# Altium PCB A1_v31.PcbDoc (part 1 of 2)
Units mm, origin at the board's own origin, x right, y up, seen from the top; angles counter-clockwise.
Board outline 100 x 80 mm, 2 copper layers (Top Layer, Bottom Layer); 46 components, 70 nets, 239 pads, 35 vias.
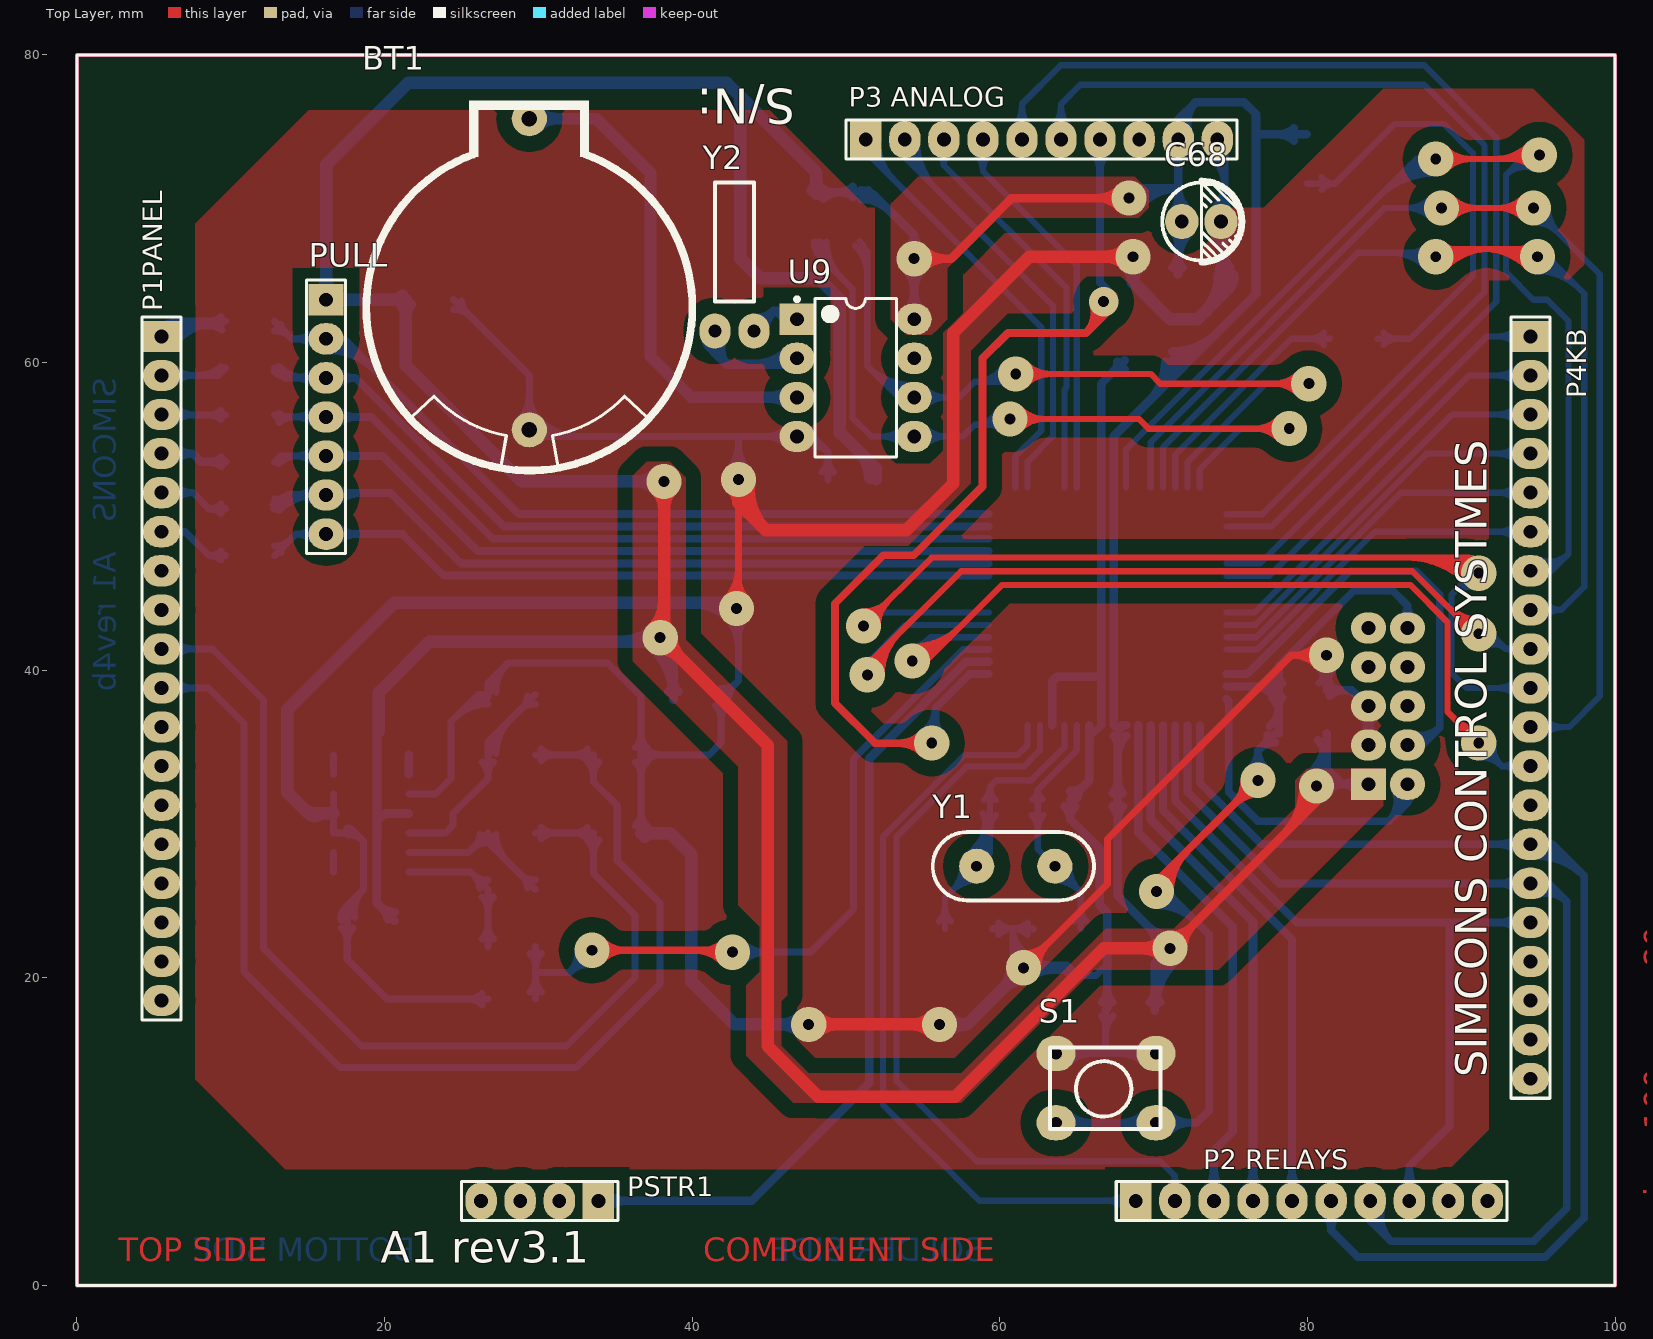
[diagram p0: Top Layer view]
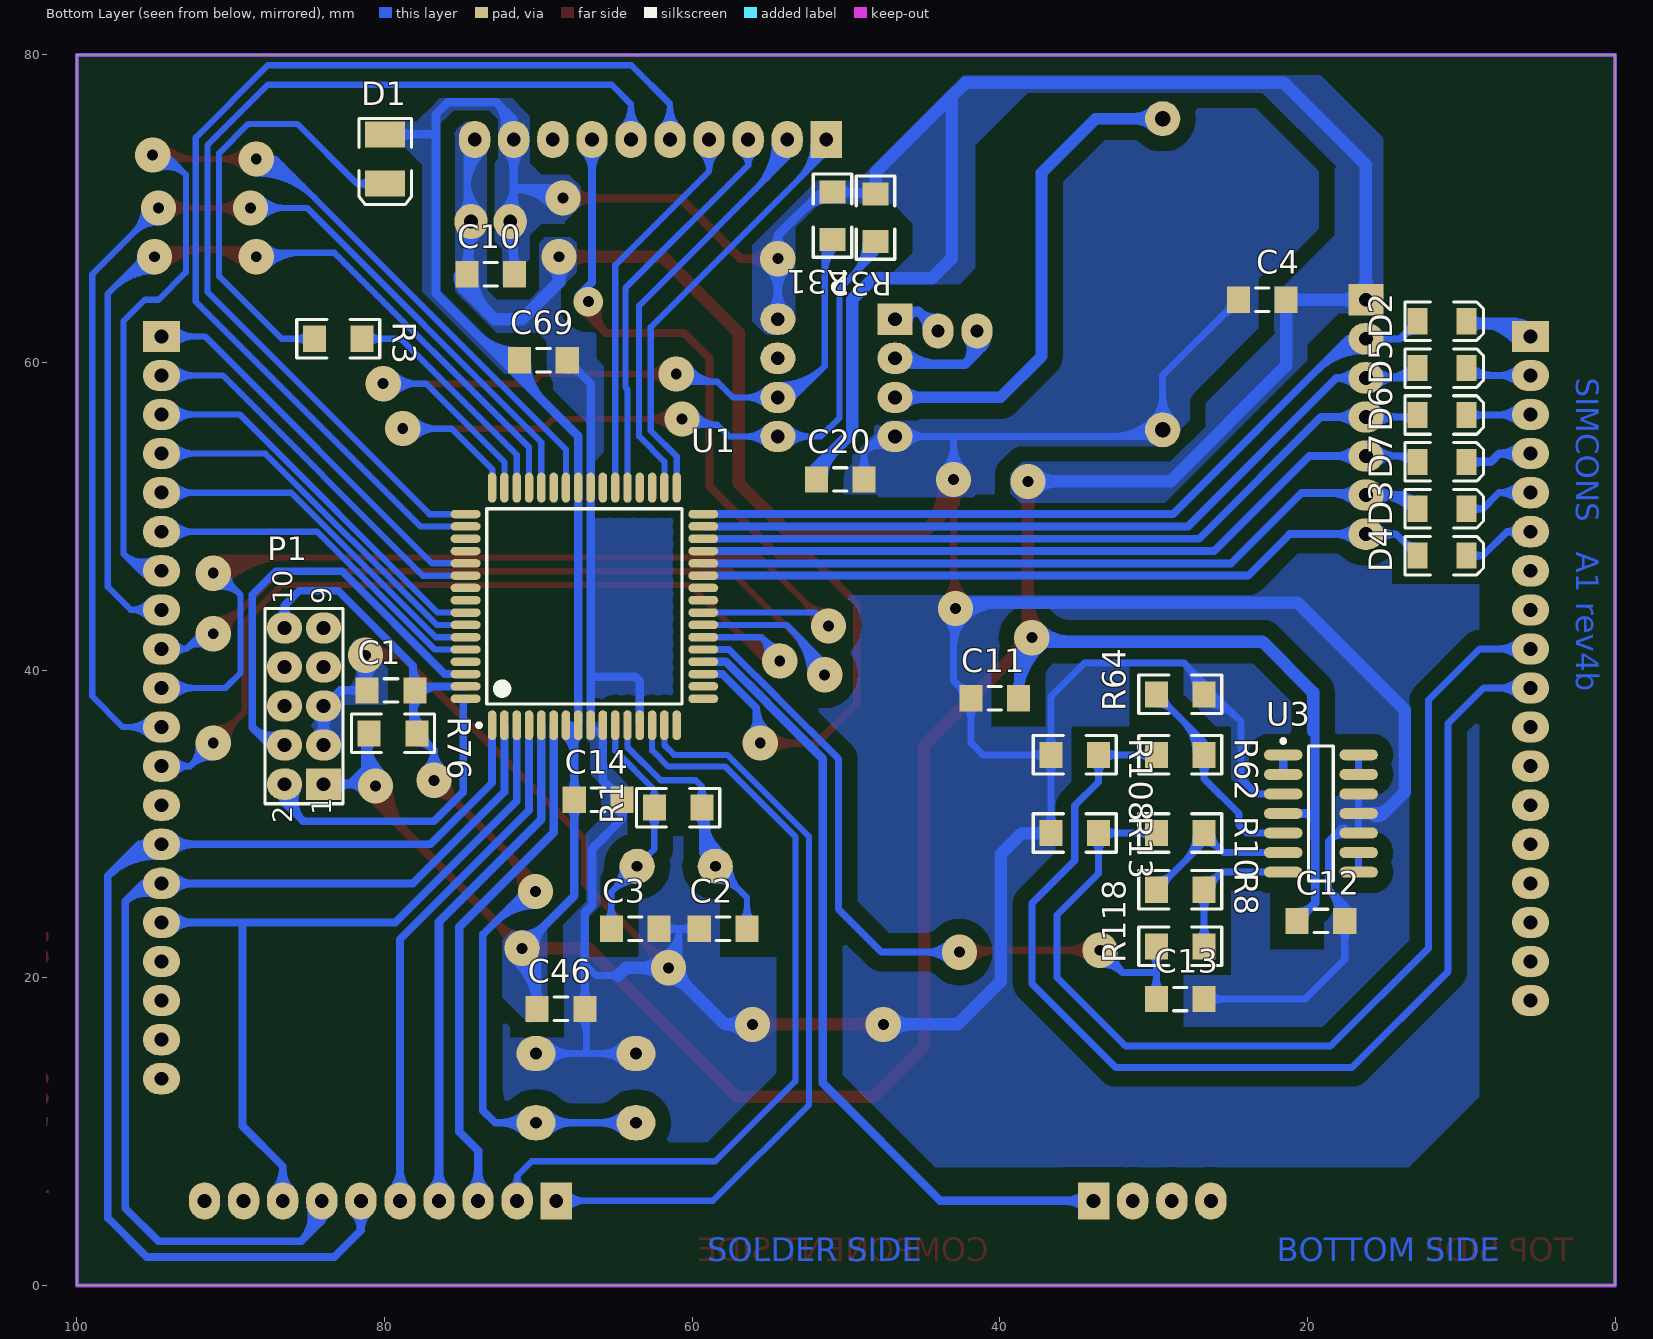
[diagram p1: Bottom Layer view, seen from below]
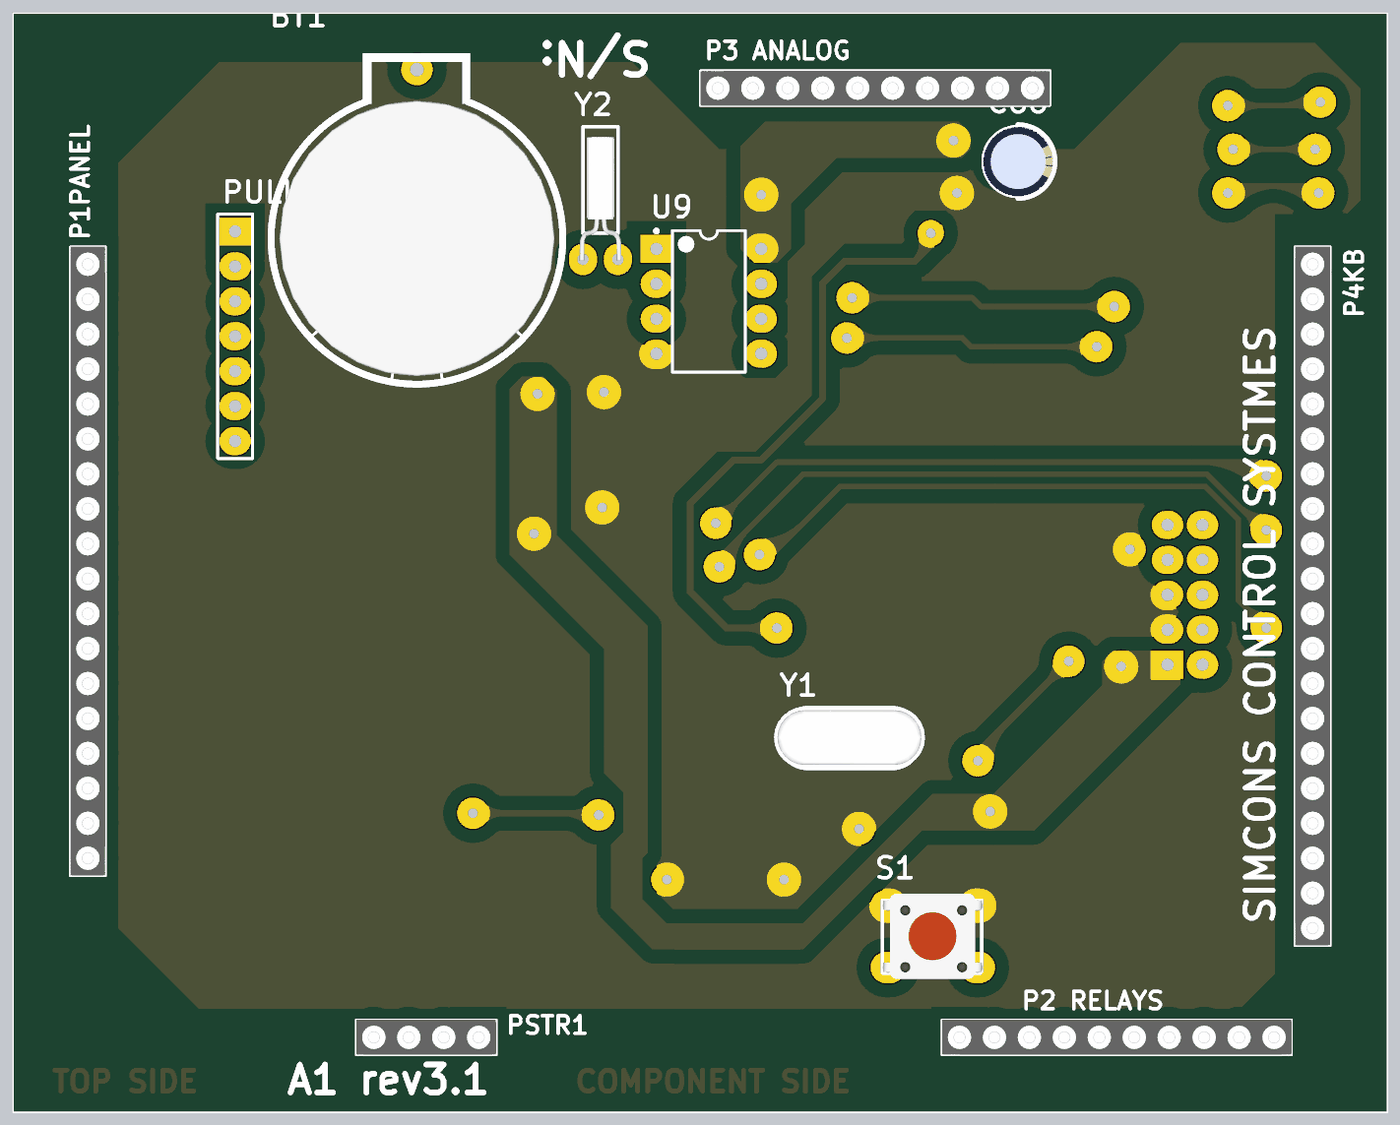
[diagram p3: 3D render of the assembled board from above, using the file's embedded part models]
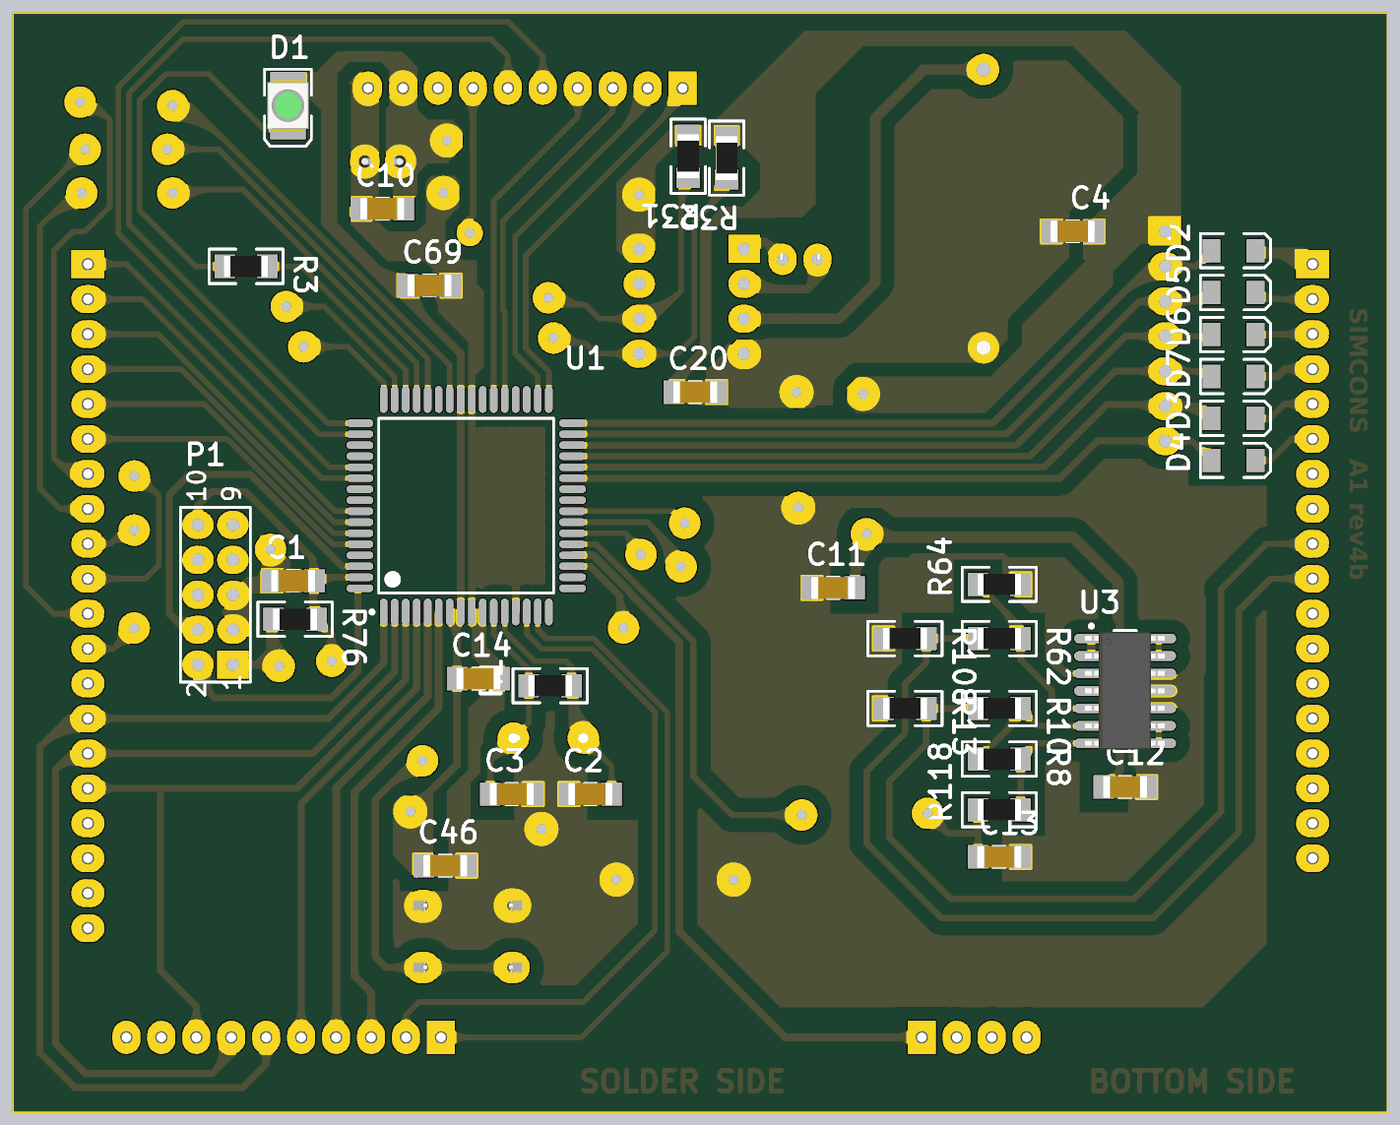
[diagram p4: 3D render of the assembled board from below, using the file's embedded part models]

## Layer stack, top to bottom
Top Solder: solder mask 0.0102, Solder Resist, Dk 3.5
Top Layer: signal copper 0.0356
Dielectric1: dielectric 0.32, FR-4, Dk 4.8
Bottom Layer: signal copper 0.0356
Bottom Solder: solder mask 0.0102, Solder Resist, Dk 3.5

## Board outline
0,0 100,0 100,80 0,80

## Design rules (kind name [scope] priority, off if disabled: settings)
Clearance [All] p1: gap=0.203
Height [All] p1: minheight=0 maxheight=254 prefheight=12.7
MinimumSolderMaskSliver [All] p1 off: minsoldermaskwidth=0.254
PlaneClearance [All] p1: clearance=0.559
PlaneConnect [All] p1: planeconnectstyle=Direct reliefexpansion=0.508 reliefentries=4 reliefconductorwidth=0.254 reliefairgap=0.254
PolygonConnect [All] p1: connectstyle=Direct reliefconductorwidth=0.254 reliefentries=4 polygonreliefangle="90 Angle" airgapwidth=0.254
RoutingVias [All] p1: holewidth=0.711 width=2.286 viastyle="Through Hole" minholewidth=0.711 minwidth=1.524 maxholewidth=0.711 maxwidth=2.54
SilkToSilkClearance [All] p1 off: silktosilkclearance=0.254
SilkToSolderMaskClearance SilkscreenOverComponentPads [IsPad] p1 off: minsilkscreentomaskgap=0.254 clearancetoexposedcopper=TRUE
SolderMaskExpansion [All] p1: expansion=0.102
Width [All] p1: maxlimit=1.524 minlimit=0.406 preferedwidth=0.559
23 further rules are at their usual default settings.

## Components (designator, comment, footprint, x,y, rotation, side; value= is the part's Value field where it differs from the comment)
BT1 "CR2032" CELL_HOLDER 29.413,63.576 r90 top
C1 ".1uF 1206" C1206_W 79.578,38.684 r180 bottom
C2 "22pF 1206" C1206_W 57.988,23.19 r180 bottom
C3 "22pF 1206" C1206_W 63.703,23.19 r0 bottom
C4 ".1uF 1206" C1206_W 22.936,64.084 r180 bottom
C10 ".1uF 1206" C1206_W 73.101,65.735 r180 bottom
C11 "1uF 1206" C1206_W 40.335,38.176 r180 bottom
C12 ".1uF 1206" C1206_W 19.126,23.698 r0 bottom
C13 ".1uF 1206" C1206_W 28.27,18.618 r180 bottom
C14 ".1uF 1206" C1206_W 66.116,31.572 r0 bottom
C20 ".1uF 1206" C1206_W 50.368,52.4 r0 bottom
C46 ".1uF 1206" C1206_W 68.529,17.983 r0 bottom
C68 "100uF/25V" Cap_.1 73.101,69.164 r90 top
C69 ".1uF 1206" C1206_W 69.672,60.147 r0 bottom
D1 "LED GREEN SMD" "LED SMD" 79.959,73.228 r270 bottom
D2 "Diode 1N4001" 4148SMD 11.252,62.687 r0 bottom
D3 "Diode 1N4001" 4148SMD 11.252,50.495 r0 bottom
D4 "Diode 1N4001" 4148SMD 11.252,47.447 r0 bottom
D5 "Diode 1N4001" 4148SMD 11.252,59.639 r0 bottom
D6 "Diode 1N4001" 4148SMD 11.252,56.591 r0 bottom
D7 "Diode 1N4001" 4148SMD 11.252,53.543 r0 bottom
P1 "Header 5X2" HDR2X5 83.959,32.588 r90 bottom
P1PANEL "Header 18" HDR1X18_BURGE_F 5.5,61.7 r270 top locked
"P2 RELAYS" "Header 10" HDR1X10_BURGE_F 68.84,5.5 r0 top locked
"P3 ANALOG" "Header 10" HDR1X10_BURGE_F 51.28,74.5 r0 top locked
P4KB "Header 20" HDR1X20_BURGE_F 94.5,61.7 r270 top locked
PSTR1 "Header 4" HDR1X4_BURGE_F 33.9,5.5 r180 top locked
PULL "Header 7" HDR1X7 16.205,64.084 r270 top
R1 "100K 1206" R1206_W 60.909,31.064 r0 bottom
R3 "1K 1206" R1206_W 83.007,61.544 r180 bottom
R8 "1M 1206" R1206_W 28.27,25.73 r180 bottom
R10 "1M 1206" R1206_W 28.27,29.413 r180 bottom
R13 "47K 1206" R1206_W 35.128,29.413 r180 bottom
R31 "4.7K 1206" R1206_W 50.876,69.545 r270 bottom
R32 "4.7K 1206" R1206_W 48.082,69.418 r270 bottom
R62 "1M 1206" R1206_W 28.27,34.493 r180 bottom
R64 "1M 1206" R1206_W 28.27,38.43 r0 bottom
R76 "100K 1206" R1206_W 79.451,35.89 r180 bottom
R108 "47K 1206" R1206_W 35.128,34.493 r180 bottom
R118 "100K 1206" R1206_W 28.27,22.047 r0 bottom
S1 "TACT SWITCH" SWSMALL 66.751,12.776 r270 top
U1 "MKE02Z Kinetis Cortex M0+ MCU" PLQP0064GA-A_M 67.005,44.145 r90 bottom
U3 "LM324D" SOIC14_M 19.126,30.683 r180 bottom
U9 "DS1307" DIP-8 50.622,59.004 r0 top
Y1 "XTAL 16MHz MINI" XTAL 61.036,27.254 r180 top
Y2 "XTAL 32.768KHz 6pF" XTALWATCH 42.748,62.052 r0 top

## Footprints (in the part's own frame and the unit in brackets; to place one, negate y for a bottom-side part, rotate by r counter-clockwise, add the part's x,y. Pads: shape width x height; smd on the part's side, far side on the other; paste and mask are expansions set on the pad)
4148SMD [mm] "Diode 250mA"
  rect 1.3x1.7 smd: 1(1.6,0) 2(-1.6,0)
  silkscreen extent -2.7,-1.25 2.4,1.25, body extent -1.78,-0.76 1.9,0.76, height 1.52
C1206_W [mm] "Chip Capacitor, Body 3.2x1.6mm, IPC High Density"
  rect 1.5x1.7 smd: 1(-1.55,0) 2(1.55,0)
  silkscreen extent -0.44,-0.76 0.44,0.76, body extent -1.6,-0.8 1.6,0.8, height 1
Cap_.1 [mil]
  oval 90x85 hole 35.43: 1(0,50) 2(0,-50)
  silkscreen extent -105,-105 105,100, body extent -100,-100 100,100, height 500
CELL_HOLDER [mm] "Lithium Battery Holder for CR2032 3V Cell"
  round 2.286 hole 1: 1(12.275,0)
  round 2.286 hole 1 mask+0: 2(-7.95,0)
  silkscreen extent -10.6,-10.6 13.47,10.6, body extent -10.62,-10.59 13.17,10.63, height 10
DIP-8 [mil] "DIP; 8 Leads; Row Spacing 7.62 mm; Pitch 2.54 mm"
  rect 90x80 hole 35.43: 1(-150,150)
  oval 90x80 hole 35.43: 2(-150,50) 3(-150,-50) 4(-150,-150) 5(150,-150) 6(150,-50) 7(150,50) 8(150,150)
  silkscreen extent -155,-203 104,206, body extent -142,-203 142,203, height 200
HDR1X4_BURGE_F [mil] "Connector; Header; 4 Position"
  rect 80x95 hole 35.43: 1(0,0)
  oval 80x95 hole 35.43: 2(100,0) 3(200,0) 4(300,0)
  silkscreen extent -50,-50 350,50, body extent -50,-50 350,50, height 237
HDR1X7 [mil] "Connector; Header; 7 Position"
  rect 80x90 hole 35.43: 1(0,0)
  oval 80x90 hole 35.43: 2(100,0) 3(200,0) 4(300,0) 5(400,0) 6(500,0) 7(600,0)
  silkscreen extent -50,-50 650,50
HDR1X10_BURGE_F [mil] "Connector; Header; 10 Position"
  rect 80x95 hole 35.43: 1(0,0)
  oval 80x95 hole 35.43: 2(100,0) 3(200,0) 4(300,0) 5(400,0) 6(500,0) 7(600,0) 8(700,0) 9(800,0) 10(900,0)
  silkscreen extent -50,-50 950,50, body extent -50,-50 950,50, height 237
HDR1X18_BURGE_F [mil] "Connector; Header; 18 Position"
  rect 80x95 hole 35.43: 1(0,0)
  oval 80x95 hole 35.43: 2(100,0) 3(200,0) 4(300,0) 5(400,0) 6(500,0) 7(600,0) 8(700,0) 9(800,0) 10(900,0) 11(1000,0) 12(1100,0) 13(1200,0) 14(1300,0) 15(1400,0) 16(1500,0) 17(1600,0) 18(1700,0)
  silkscreen extent -50,-50 1750,50, body extent -50,-50 1750,50, height 237
HDR1X20_BURGE_F [mil] "Connector; Header; 20 Position"
  rect 80x95 hole 35.43: 1(0,0)
  oval 80x95 hole 35.43: 2(100,0) 3(200,0) 4(300,0) 5(400,0) 6(500,0) 7(600,0) 8(700,0) 9(800,0) 10(900,0) 11(1000,0) 12(1100,0) 13(1200,0) 14(1300,0) 15(1400,0) 16(1500,0) 17(1600,0) 18(1700,0) 19(1800,0) 20(1900,0)
  silkscreen extent -50,-50 1950,50, body extent -50,-50 1950,50, height 237
HDR2X5 [mil] "Connector; Header; 5x2 Position"
  rect 80x90 hole 35.43: 1(0,0)
  oval 80x90 hole 35.43: 2(0,100) 3(100,0) 4(100,100) 5(200,0) 6(200,100) 7(300,0) 8(300,100) 9(400,0) 10(400,100)
  silkscreen extent -50,-50 450,150
"LED SMD" [mm] "SM LED; 2 C-Bend Leads; Body 3.5 x 2.8 x 1.9 mm, inc leads (LxWxH typ)"
  rect 1.7x2.6 smd: 1(-1.6,0) 2(1.6,0)
  silkscreen extent -2.65,-1.7 2.95,1.7, body extent -1.85,-1.5 1.85,1.5, height 2.1
PLQP0064GA-A_M [mm] "QFP, 64-Leads, Body 14x14mm, Pitch 0.8mm, IPC Low Density"
  oval 1.95x0.55 smd: 1(-7.725,6) 2(-7.725,5.2) 3(-7.725,4.4) 4(-7.725,3.6) 5(-7.725,2.8) 6(-7.725,2) 7(-7.725,1.2) 8(-7.725,0.4) 9(-7.725,-0.4) 10(-7.725,-1.2) 11(-7.725,-2) 12(-7.725,-2.8) 13(-7.725,-3.6) 14(-7.725,-4.4) 15(-7.725,-5.2) 16(-7.725,-6) 33(7.725,-6) 34(7.725,-5.2) 35(7.725,-4.4) 36(7.725,-3.6) 37(7.725,-2.8) 38(7.725,-2) 39(7.725,-1.2) 40(7.725,-0.4) 41(7.725,0.4) 42(7.725,1.2) 43(7.725,2) 44(7.725,2.8) 45(7.725,3.6) 46(7.725,4.4) 47(7.725,5.2) 48(7.725,6)
  oval 0.55x1.95 smd: 17(-6,-7.725) 18(-5.2,-7.725) 19(-4.4,-7.725) 20(-3.6,-7.725) 21(-2.8,-7.725) 22(-2,-7.725) 23(-1.2,-7.725) 24(-0.4,-7.725) 25(0.4,-7.725) 26(1.2,-7.725) 27(2,-7.725) 28(2.8,-7.725) 29(3.6,-7.725) 30(4.4,-7.725) 31(5.2,-7.725) 32(6,-7.725) 49(6,7.725) 50(5.2,7.725) 51(4.4,7.725) 52(3.6,7.725) 53(2.8,7.725) 54(2,7.725) 55(1.2,7.725) 56(0.4,7.725) 57(-0.4,7.725) 58(-1.2,7.725) 59(-2,7.725) 60(-2.8,7.725) 61(-3.6,7.725) 62(-4.4,7.725) 63(-5.2,7.725) 64(-6,7.725)
  silkscreen extent -7.85,-6.35 6.35,6.98, body extent -7,-7 7,7, height 1.7
R1206_W [mm] "Chip Capacitor, Body 3.2x1.6mm, IPC High Density"
  rect 1.5x1.7 smd: 1(-1.55,0) 2(1.55,0)
  silkscreen extent -2.7,-1.25 2.7,1.25, body extent -1.59,-0.77 1.59,0.77, height 0.63
SOIC14_M [mm] "SOIC, 14-Leads, Body 8.7x3.9mm, Pitch 1.27mm, IPC Low Density"
  oval 2.5x0.7 smd: 1(-2.45,3.81) 2(-2.45,2.54) 3(-2.45,1.27) 4(-2.45,0) 5(-2.45,-1.27) 6(-2.45,-2.54) 7(-2.45,-3.81) 8(2.45,-3.81) 9(2.45,-2.54) 10(2.45,-1.27) 11(2.45,0) 12(2.45,1.27) 13(2.45,2.54) 14(2.45,3.81)
  silkscreen extent -2.58,-4.4 0.8,4.83, body extent -2.92,-4.28 2.88,4.27, height 1.75
SWSMALL [mm]
  oval 2.286x2.54 hole 0.762: 1(2.2,3.4) 1(2.2,-3.1) 2(-2.3,3.4) 2(-2.3,-3.1)
  silkscreen extent -2.7,-3.5 2.6,3.7, body extent -3.18,-3.82 3.03,4.08, height 7
XTAL [mil] "Multi Layer Capacitor"
  round 90 hole 28: 1(-100,0) 2(100,0)
  silkscreen extent -200,-88 212,88, body extent -209,-90 224,87, height 142
XTALWATCH [mil]
  oval 80x90 hole 33: 1(50,0) 2(-50,0)
  silkscreen extent -50,75 50,380, body extent -60,-3 60,350, height 79

## Part data
BT1: library part Battery, "Multicell Battery"
C1 C2 C3 C4 C10 C11 C12 C14 C20 C46 C68 C69: library part Cap, "Capacitor"
C13: library part Cap2, "Capacitor"
D1: library part LED1, "Typical RED GaAs LED"
D2 D3 D4 D5 D6 D7: "1 Amp General Purpose Rectifier"
P1: "Header, 5-Pin, Dual row"
P1PANEL: "Header, 18-Pin"
"P2 RELAYS" "P3 ANALOG": "Header, 10-Pin"
P4KB: "Header, 20-Pin"
PSTR1: "Header, 4-Pin"
PULL: "Header, 7-Pin"
R1 R3 R8 R10 R13 R31 R32 R62 R64 R76 R108: library part Res1, "Resistor"
R118: library part "Res Semi", "Semiconductor Resistor"
S1: library part SW-PB, "Switch"
U1: library part MKE02Z64, "32-Bit ARM Cortex M0+ RISC Core, 64KB Program Flash, 256B EEPROM, 4KB RAM, 64-Pin LQFP"
U3: "Quadruple Operational Amplifier"
U9: "64 X 8 Serial Real-Time Clock"
Y1 Y2: library part XTAL, "Crystal Oscillator"

## Via types
v1: diameter 2.286, hole 0.711, Top Layer to Bottom Layer, 34 vias
v2: diameter 1.905, hole 0.711, Top Layer to Bottom Layer, 1 vias

## Nets (pads, with @x,y where several pads share a name; then routed paths per layer and width w, separated by ;. In a path a pad name is that pad's centre, name@x,y a point inside that pad or via, vN(x,y) a via of type N, cw(c..) or ccw(c..) an arc to the next point about the centre after c; other vN are vias at no path point)
AUTO: P4KB.8 U1.45 | length 93
  Top Layer w0.406: v1(88.341,66.878) 88.341,67.259 88.468,67.386 94.183,67.386 v1@94.31,67.259 ; v1@88.431,66.788 cw(c89.874,65.345) 89.874,67.386 ; v1@88.718,66.501 cw(c90.855,64.364) 90.855,67.386 ; v1@89.006,66.213 cw(c91.836,63.383) 91.836,67.386 ; v1@89.006,67.543 ccw(c89.383,67.92) 89.383,67.386 ; 91.45,67.386 cw(c91.45,63.383) v1@94.28,66.213 ; 92.431,67.386 cw(c92.431,64.364) v1@94.568,66.501 ; 93.412,67.386 cw(c93.412,65.345) v1@94.855,66.788 ; 93.903,67.386 ccw(c93.903,67.92) v1@94.28,67.543 ; v1@94.437,67.132 v1@94.31,67.259 ; v1(94.945,66.878) 94.31,67.513 v1@94.31,67.259
  Bottom Layer w0.406: U1.45@70.605,51.87 70.605,54.476 83.261,67.132 87.96,67.132 v1@88.341,67.513 ; 85.459,67.132 cw(c85.459,63.996) v1@87.676,66.213 ; 86.44,67.132 cw(c86.44,64.977) v1@87.964,66.501 ; 86.685,67.132 ccw(c86.685,68.534) v1@87.676,67.543 ; P4KB.8@94.5,43.92 96.498,43.92 ; v1@94.945,65.938 cw(c94.945,62.136) 97.633,64.825 ; v1@94.945,66.345 cw(c94.945,63.524) 96.94,65.518 ; v1@94.945,66.751 cw(c94.945,64.911) 96.246,66.212 ; v1(94.945,66.878) v1@94.691,67.132 ; P4KB.8@95.299,43.381 cw(c96.498,42.317) 96.498,43.92 ; P4KB.8@95.299,44.459 ccw(c96.498,45.523) 96.498,43.92 ; v1@95.885,66.878 ccw(c96.621,66.878) 96.1,66.358 ; v1@94.691,67.132 95.326,67.132 97.993,64.465 97.993,45.415 96.498,43.92 ; v1@94.691,67.132 94.437,67.132 94.31,67.259 94.31,67.513 v1@94.691,67.132
BAT: PSTR1.1 U1.20 | length 55.1
  Bottom Layer w0.559: PSTR1.1@33.9,5.5 43.854,5.5 51.511,13.157 51.511,34.239 55.092,37.82 55.092,37.846 57.728,40.482 57.743,40.482 57.807,40.545 U1.20@59.28,40.545 ; PSTR1.1@34.421,4.979 cw(c35.678,3.722) 35.678,5.5 cw(c35.678,7.278) PSTR1.1@34.421,6.021
BTS+_R: P1PANEL.10 R62.1 R108.2 | length 83.7
  Bottom Layer w0.457: P1PANEL.10@5.5,38.84 8.556,38.84 10.871,36.525 10.871,20.396 17.094,14.173 32.461,14.173 37.922,19.634 37.922,24.841 35.128,27.635 35.128,31.191 33.578,32.741 R108.2@33.578,34.493 R62.1@29.82,34.493 ; P1PANEL.10@6.247,38.283 cw(c7.591,36.939) 7.591,38.84 cw(c7.591,40.741) P1PANEL.10@6.247,39.397 ; R62.1@30.189,34.124 cw(c31.079,33.234) 31.079,34.493 cw(c31.079,35.752) R62.1@30.189,34.862 ; R108.2@33.209,34.024 cw(c32.319,33.134) 33.578,33.134 cw(c34.837,33.134) R108.2@33.947,34.024 ; R108.2@33.209,34.124 ccw(c32.319,33.234) 32.319,34.493 ccw(c32.319,35.752) R108.2@33.209,34.862
BTS-_R: P1PANEL.9 R10.1 R13.2 | length 75.9
  Bottom Layer w0.457: P1PANEL.9@5.5,41.38 8.81,41.38 12.141,38.049 12.141,21.92 18.491,15.57 31.826,15.57 36.271,20.015 36.271,24.079 33.578,26.772 R13.2@33.578,29.413 R10.1@29.82,29.413 ; P1PANEL.9@6.247,40.823 cw(c7.591,39.479) 7.591,41.38 cw(c7.591,43.281) P1PANEL.9@6.247,41.937 ; R10.1@30.189,29.044 cw(c31.079,28.154) 31.079,29.413 cw(c31.079,30.672) R10.1@30.189,29.782 ; R13.2@33.209,28.944 cw(c32.319,28.054) 33.578,28.054 cw(c34.837,28.054) R13.2@33.947,28.944 ; R13.2@33.209,29.044 ccw(c32.319,28.154) 32.319,29.413 ccw(c32.319,30.672) R13.2@33.209,29.782
BTSBATT: C13.1 R118.2 U1.21 | length 66.3
  Top Layer w0.457: v1(33.477,21.793) 42.621,21.793 v1@42.748,21.92 ; v1@34.124,21.146 cw(c35.685,19.585) 35.685,21.793 cw(c35.685,24.001) v1@34.124,22.44 ; 40.107,21.793 cw(c40.107,19.152) v1@41.974,21.019 ; 40.72,21.793 ccw(c40.72,23.567) v1@41.974,22.313 ; 41.211,21.793 cw(c41.211,20.256) v1@42.298,21.343
  Bottom Layer w0.457: C13.1@29.451,19.087 ccw(c28.561,19.977) 29.82,19.977 ccw(c31.079,19.977) C13.1@30.189,19.087 ; R118.2@29.451,21.578 cw(c28.561,20.688) 29.82,20.688 cw(c31.079,20.688) R118.2@30.189,21.578 ; C13.1@29.82,18.618 29.82,20.332 ; R118.2@29.82,22.047 29.82,20.332 ; v1@32.564,21.749 cw(c30.691,21.659) 32.017,20.333 ; v1@33.433,20.88 ccw(c33.343,19.007) 32.017,20.333 ; v1(33.477,21.793) 32.016,20.332 ; v1(42.621,21.666) 47.701,21.666 50.495,24.46 50.495,34.239 54.381,38.125 54.381,38.141 57.433,41.193 57.449,41.193 57.601,41.345 U1.21@59.28,41.345 ; v1@43.268,21.019 cw(c44.829,19.458) 44.829,21.666 cw(c44.829,23.874) v1@43.268,22.313 ; 29.82,20.332 32.016,20.332
BUZZER: "P2 RELAYS.1" U1.15 | length 52.7
  Bottom Layer w0.406: U1.15@61.805,36.42 61.805,35.135 61.163,34.493 57.734,34.493 52.4,29.159 52.4,11.76 58.66,5.5 68.84,5.5 ; 68.265,4.925 ccw(c66.878,3.538) 66.878,5.5 ccw(c66.878,7.462) 68.265,6.075
CONT_S_IN: P1PANEL.8
CRANK: "P2 RELAYS.4" U1.5 | length 36.5
  Bottom Layer w0.559: U1.5@69.805,36.42 69.805,30.296 76.46,23.641 76.46,5.5 ; 75.939,6.211 ccw(c74.682,7.469) 76.46,7.469 ccw(c78.238,7.469) 76.981,6.211
DG-B_: "P3 ANALOG.3" U1.37 | length 27.9
  Bottom Layer w0.406: 55.922,73.625 cw(c55.409,72.824) 56.36,72.824 ; 56.36,74.5 56.36,72.824 ; 56.798,73.625 ccw(c57.311,72.824) 56.36,72.824 ; U1.37@64.205,51.87 64.205,58.248 64.338,58.381 64.338,64.846 56.36,72.824
DG-R_: "P3 ANALOG.1" U1.33 | length 34.2
  Bottom Layer w0.406: 51.28,73.497 cw(c51.28,72.974) 51.649,73.344 ; 51.28,74.309 ccw(c52.72,74.309) 51.702,73.291 ; 51.28,74.5 51.28,73.713 62.687,62.306 62.687,55.575 61.005,53.893 U1.33@61.005,51.87 ; 51.686,74.309 ccw(c54.108,74.309) 52.396,72.597 ; 52.093,74.309 ccw(c55.495,74.309) 53.089,71.904
DG-Y_: "P3 ANALOG.2" U1.34 | length 35.2
  Bottom Layer w0.406: 53.82,74.309 ccw(c56.18,74.309) 54.511,72.641 ; 53.82,74.5 53.82,73.332 63.449,63.703 63.449,55.194 61.805,53.55 U1.34@61.805,51.87 ; 54.226,74.309 ccw(c57.567,74.309) 55.205,71.947 ; 54.633,74.309 ccw(c58.955,74.309) 55.899,71.253
DGSTOP: "P2 RELAYS.5" U1.4 | length 37.3
  Bottom Layer w0.508: U1.4@70.605,36.42 70.605,30.893 79,22.498 79,5.5 ; 78.461,6.229 ccw(c77.16,7.53) 79,7.53 ccw(c80.84,7.53) 79.539,6.229
DOWN: P4KB.10 U1.24 | length 91.7
  Top Layer w0.406: v1(51.13,42.875) 55.575,47.32 90.5,47.32 ; v1@51.13,43.408 ccw(c51.13,44.696) 52.041,43.786 ccw(c52.951,42.875) v1@51.663,42.875 ; v1@51.13,43.815 ccw(c51.13,46.084) 52.734,44.479 ccw(c54.339,42.875) v1@52.07,42.875 ; 86.413,47.32 cw(c86.413,41.582) v1@90.47,45.639 ; 87.394,47.32 cw(c87.394,42.563) v1@90.758,45.927 ; 88.376,47.32 cw(c88.376,43.545) v1@91.045,46.214 ; 89.357,47.32 cw(c89.357,44.526) v1@91.333,46.502 ; 90.338,47.32 cw(c90.338,45.507) v1@91.62,46.789 ; v1@90.896,47.213 cw(c90.791,47.611) 90.5,47.32 ; v1(91.135,46.304) 91.516,46.304 90.5,47.32
  Bottom Layer w0.406: v1(51.13,42.875) 52,43.745 U1.24@59.28,43.745 ; 89.8,45.35 ccw(c88.846,46.304) v1@90.195,46.304 ; 89.891,45.441 cw(c90.776,44.556) v1@91.028,45.782 ; v1@90.5,46.05 89.357,44.907 ; v1@90.946,45.383 ccw(c90.594,43.67) 89.357,44.907 ; P4KB.10@93.735,38.265 ccw(c92.347,36.878) 92.347,38.84 ccw(c92.347,40.802) P4KB.10@93.735,39.415 ; P4KB.10@94.5,38.84 90.344,38.84 89.357,39.827 89.357,44.907
EB-B_: "P3 ANALOG.6" U1.49 | length 67.4
  Bottom Layer w0.406: 63.405,75.265 ccw(c62.018,76.653) 63.98,76.653 ccw(c65.942,76.653) 64.555,75.265 ; 63.98,74.5 63.98,76.807 65.227,78.054 87.579,78.054 91.516,74.117 91.516,64.592 77.069,50.145 U1.49@74.73,50.145
EB-R_: "P3 ANALOG.4" U1.38 | length 28
  Bottom Layer w0.406: 58.346,73.714 cw(c57.164,72.443) 58.9,72.443 ; 58.9,74.5 58.9,72.443 ; 59.454,73.714 ccw(c60.637,72.443) 58.9,72.443 ; U1.38@65.005,51.87 65.005,66.338 58.9,72.443
EB-Y_: "P3 ANALOG.5" U1.50 | length 73.5
  Bottom Layer w0.406: 60.865,75.265 ccw(c59.478,76.653) 61.44,76.653 ccw(c63.402,76.653) 62.015,75.265 ; 61.44,74.5 61.44,76.807 63.957,79.324 87.579,79.324 92.278,74.625 92.278,63.957 77.666,49.345 U1.50@74.73,49.345
EMSTP: D7.1 PULL.5 U1.29 | length 56.3
  Bottom Layer w0.457: D7.1@12.852,53.543 13.233,53.924 PULL.5@16.205,53.924 ; D7.1@13.15,53.445 cw(c14.306,52.289) 14.306,53.924 ; PULL.5@15.521,53.367 ccw(c14.177,52.023) 14.177,53.924 ccw(c14.177,55.825) PULL.5@15.521,54.481
  Bottom Layer w0.508: PULL.5@16.205,53.924 19.888,53.924 26.067,47.745 U1.29@59.28,47.745 ; PULL.5@16.871,53.385 cw(c18.172,52.084) 18.172,53.924 cw(c18.172,55.764) PULL.5@16.871,54.463
EMSTPIN: D7.2 P1PANEL.4 | length 8.6
  Bottom Layer w0.559: P1PANEL.4@5.5,54.08 7.54,54.08 8.077,53.543 D7.2@9.652,53.543 ; P1PANEL.4@6.211,53.559 cw(c7.469,52.302) 7.469,54.08 cw(c7.469,55.858) P1PANEL.4@6.211,54.601 ; D7.2@9.39,53.281 ccw(c8.757,52.648) 8.757,53.543 ccw(c8.757,54.438) D7.2@9.39,53.805
FAULTIND: P4KB.7 U1.42 | length 107.3
  Top Layer w0.406: v1(88.341,73.228) 88.341,73.101 88.468,72.974 88.468,73.228 v1@94.691,73.228 ; v1@88.718,72.851 cw(c89.629,71.94) 89.629,73.228 cw(c89.629,74.516) v1@88.718,73.605 ; v1@89.006,72.563 cw(c90.61,70.959) 90.61,73.228 cw(c90.61,75.497) v1@89.006,73.893 ; 92.19,73.228 ccw(c92.19,76.364) v1@94.407,74.147 ; 93.171,73.228 ccw(c93.171,75.383) v1@94.695,73.859 ; 93.416,73.228 cw(c93.416,71.826) v1@94.407,72.817
  Bottom Layer w0.406: U1.42@68.205,51.87 68.205,54.362 87.071,73.228 ; 84.569,70.726 cw(c88.341,66.953) v1@88.341,72.288 ; 85.262,71.419 cw(c88.341,68.341) v1@88.341,72.695 ; 85.956,72.113 cw(c88.341,69.728) v1@88.341,73.101 ; 86.65,72.807 cw(c88.341,71.116) v1@88.341,73.507 ; v1@87.442,72.953 ccw(c87.071,72.84) 87.071,73.228 ; v1@87.442,73.503 cw(c87.071,73.616) 87.071,73.228 ; v1(88.341,73.228) 87.071,73.228 ; 93.357,72.656 cw(c94.373,71.641) v1@94.883,72.983 ; v1@94.379,72.847 ccw(c93.802,72.318) 93.802,73.101 ; P4KB.7@94.5,46.46 95.863,46.46 ; P4KB.7@94.527,46.088 ccw(c94.957,47.069) 95.714,46.311 ; P4KB.7@94.69,46.46 ccw(c95.214,47.654) 96.135,46.732 ; v1@94.738,72.603 ccw(c94.128,70.997) 92.913,72.212 ; P4KB.7@94.854,46.832 ccw(c95.47,48.239) 96.556,47.153 ; P4KB.7@95.017,47.205 ccw(c95.726,48.825) 96.977,47.574 ; v1@95.027,73.363 ccw(c94.617,72.285) 93.802,73.101 ; v1(95.072,73.482) 95.072,73.228 94.945,73.101 93.802,73.101 ; P4KB.7@95.452,46.175 cw(c95.863,46.021) 95.863,46.46 ; P4KB.7@95.452,46.745 ccw(c95.863,46.899) 95.863,46.46 ; 92.913,72.212 92.913,65.862 94.691,64.084 95.58,64.084 96.977,62.687 96.977,47.574 ; 92.913,72.212 93.802,73.101 ; 95.863,46.46 96.977,47.574
FLDIR: D3.1 PULL.6 U1.28 | length 59.7
  Bottom Layer w0.508: D3.1@12.773,50.774 cw(c14.245,49.302) 14.245,51.384 ; D3.1@12.852,50.495 13.741,51.384 ; D3.1@12.896,51.088 ccw(c13.012,52.113) 13.741,51.384 ; D3.1@13.132,50.415 cw(c15.471,48.076) PULL.6@15.471,51.384 ; PULL.6@15.539,50.845 ccw(c14.238,49.544) 14.238,51.384 ccw(c14.238,53.224) PULL.6@15.539,51.923 ; PULL.6@16.871,50.845 cw(c18.478,49.238) 18.478,51.511 ; PULL.6@16.871,51.923 ccw(c17.865,52.917) 17.865,51.511 ; U1.28@59.28,46.945 24.962,46.945 20.396,51.511 16.332,51.511 PULL.6@16.205,51.384 13.741,51.384
FLDIRIN: D3.2 P1PANEL.5 | length 9
  Bottom Layer w0.457: P1PANEL.5@5.5,51.54 7.54,51.54 ; P1PANEL.5@6.258,50.994 cw(c7.54,49.762) 7.54,51.54 ; P1PANEL.5@6.258,52.086 ccw(c7.54,53.318) 7.54,51.54 ; D3.2@9.354,50.197 ccw(c8.635,49.478) 8.635,50.495 ccw(c8.635,51.512) D3.2@9.354,50.793 ; D3.2@9.652,50.495 8.585,50.495 7.54,51.54
FLGIN: P1PANEL.11
FLSTART: "P2 RELAYS.3" U1.6 | length 36.8
  Bottom Layer w0.559: U1.6@69.005,36.42 69.005,29.445 75.133,23.317 75.133,9.982 73.92,8.769 73.92,5.5 ; 73.399,6.211 ccw(c72.142,7.469) 73.92,7.469 ccw(c75.698,7.469) 74.441,6.211
FLT1: D2.1 PULL.2 U1.32 | length 63.4
  Bottom Layer w0.457: D2.1@12.852,62.066 cw(c12.852,60.565) 13.913,61.626 ; D2.1@12.852,62.687 13.995,61.544 PULL.2@16.205,61.544 ; D2.1@13.273,62.487 ccw(c13.808,62.487) D2.1@13.43,62.109 ; PULL.2@15.521,60.987 ccw(c14.177,59.643) 14.177,61.544 ccw(c14.177,63.445) PULL.2@15.521,62.101
  Bottom Layer w0.508: PULL.2@16.205,61.544 17.348,61.544 28.747,50.145 U1.32@59.28,50.145 ; PULL.2@16.332,60.782 cw(c16.332,56.49) 19.367,59.525 ; PULL.2@16.332,61.29 cw(c16.332,58.224) 18.5,60.392 ; PULL.2@16.332,61.798 cw(c16.332,59.958) 17.633,61.259
FLT1IN: D2.2 P1PANEL.1 | length 18.1
  Bottom Layer w0.457: P1PANEL.1@5.255,62.089 cw(c6.59,60.898) P1PANEL.1@6.59,62.687 ; P1PANEL.1@5.5,61.7 6.487,62.687 D2.2@9.652,62.687 ccw(c9.652,58.165) P1PANEL.1@6.278,61.176 ; P1PANEL.1@5.596,61.785 cw(c7.61,59.987) 7.61,62.687 ; P1PANEL.1@5.937,61.48 cw(c8.631,59.076) 8.631,62.687 ; 8.158,62.344 cw(c8.535,60.704) D2.2@9.428,62.13 ; D2.2@9.354,62.389 ccw(c8.635,61.67) 8.635,62.687 ccw(c8.635,63.704) D2.2@9.354,62.985
FREQ: "P3 ANALOG.7" U1.19 | length 80.2
  Top Layer w0.508: v1@54.946,34.626 ccw(c53.429,33.109) 53.429,35.255 ccw(c53.429,37.401) v1@54.946,35.884 ; v2@66.08,63.762 cw(c64.29,63.243) 65.608,61.925 ; 66.216,62.533 ccw(c65.232,63.516) v2@66.568,63.904 ; v2(66.751,63.957) 67.005,63.957 67.386,64.338 67.386,63.703 65.608,61.925 ; v1(55.575,35.255) 56.21,35.255 55.575,35.89 v1(55.575,35.255) ; v1(55.575,35.255) 51.892,35.255 49.276,37.871 49.276,44.323 52.425,47.472 54.409,47.472 58.877,51.941 58.877,60.274 60.528,61.925 65.608,61.925
  Bottom Layer w0.508: v1@55.042,35.966 ccw(c53.861,37.541) 55.829,37.541 ; v1@55.346,35.56 ccw(c54.623,36.525) 55.829,36.525 ; v1(55.575,35.255) 55.575,35.89 55.829,36.144 55.829,37.541 ; 55.829,36.788 ccw(c57.108,36.788) v1@56.204,35.884 ; U1.19@59.28,39.745 58.033,39.745 55.829,37.541 ; 65.981,73.771 cw(c64.68,72.47) 66.52,72.47 cw(c68.36,72.47) 67.059,73.771 ; 66.52,74.5 66.52,65.204 67.386,64.338 67.005,63.957 v2(66.751,63.957)
GCONTACT: "P2 RELAYS.8" P4KB.16 U1.3 | length 56.3
  Bottom Layer w0.508: U1.3@71.405,36.42 71.405,31.49 79.295,23.6 89.201,23.6 ; 86.081,6.229 ccw(c84.78,7.53) 86.62,7.53 ccw(c88.46,7.53) 87.159,6.229 ; 86.62,5.5 86.62,7.753 89.23,10.363 89.23,23.571 89.201,23.6 ; P4KB.16@93.771,23.061 ccw(c92.47,21.76) 92.47,23.6 ccw(c92.47,25.44) P4KB.16@93.771,24.139 ; P4KB.16@94.5,23.6 89.201,23.6
GND: "P3 ANALOG.10" BT1.2 C1.1 C2.1 C3.1 C4.1 C10.1 C11.1 C12.1 C13.2 C14.1 C20.1 C46.1 C68.2 C69.1 P1.3 P1.5 R13.1 R64.1 R108.1 S1.2 U1.9 U1.10 U1.13 U1.40 U3.3 U3.10 U3.11 U3.12 U9.4 | length 526.9
  Top Layer w0.457: v1@42.228,44.665 ccw(c40.361,46.532) 43.002,46.532 ; v1@42.552,44.341 ccw(c41.465,45.428) 43.002,45.428 ; v1@43.002,44.018 43.002,50.876 ; 43.002,45.919 ccw(c44.776,45.919) v1@43.522,44.665 ; v1(61.544,20.65) 67.005,26.111 67.005,29.032 78.943,40.97 v1(81.229,40.97) ; v1@61.544,21.564 ccw(c61.544,23.772) 63.105,22.211 ccw(c64.666,20.65) v1@62.458,20.65 ; v1@80.582,40.323 ccw(c79.021,38.762) 79.021,40.97 ccw(c79.021,43.178) v1@80.582,41.617
  Top Layer w0.813: v1@42.544,51.823 cw(c41.794,50.876) 43.002,50.876 ; v1@42.927,52.411 ccw(c45.438,52.032) 43.642,50.236 ; v1(43.002,52.4) 43.002,50.876 ; v1@43.46,51.823 ccw(c44.21,50.876) 43.002,50.876 ; v1@43.73,52.29 ccw(c47.415,51.733) 44.78,49.098 ; v1(47.574,16.967) v1(56.083,16.967) ; v1@48.095,16.446 cw(c49.352,15.189) 49.352,16.967 cw(c49.352,18.745) v1@48.095,17.488 ; v1@55.562,16.446 ccw(c54.305,15.189) 54.305,16.967 ccw(c54.305,18.745) v1@55.562,17.488 ; v1@68.135,66.357 ccw(c66.878,65.1) 66.878,66.878 ccw(c66.878,68.656) v1@68.135,67.399 ; v1(68.656,66.878) 61.925,66.878 56.972,61.925 56.972,52.146 53.924,49.098 44.78,49.098 ; 43.002,50.876 44.78,49.098
  Bottom Layer w0.457: U3.12@16.676,31.953 U3.11@16.676,30.683 U3.10@16.676,29.413 18.11,29.413 18.618,28.905 ; C12.1@17.192,23.714 cw(c18.077,23.908) 17.436,24.548 ; C12.1@17.207,23.229 cw(c16.317,22.339) 17.576,22.339 cw(c18.835,22.339) C12.1@17.945,23.229 ; C12.1@17.321,24.253 ccw(c17.077,24.688) 17.576,24.688 ; U3.10@17.553,29.748 cw(c17.584,29.292) 17.908,29.615 ; U3.10@17.584,29.292 cw(c17.676,27.963) 18.618,28.905 ; C12.1@17.639,23.812 cw(c19.046,24.121) 18.027,25.139 ; C12.1@17.831,24.253 cw(c18.075,24.688) 17.576,24.688 ; C12.1@18.085,23.91 cw(c20.015,24.333) 18.618,25.73 ; U3.3@21.576,31.953 23.317,31.953 24.333,32.969 24.333,36.652 26.111,38.43 R64.1@26.72,38.43 26.72,39.166 28.016,40.462 ; C4.1@24.486,63.463 cw(c24.486,61.962) 25.547,63.023 ; C4.1@24.486,64.084 29.413,59.157 BT1.2@29.413,55.626 29.845,55.194 43.002,55.194 ; 24.62,36.939 cw(c26.72,34.838) R64.1@26.72,37.809 ; C4.1@25.007,63.984 ccw(c26.025,63.984) 25.305,63.265 ; 25.4,37.719 cw(c26.72,36.399) R64.1@26.72,38.266 ; C13.2@26.351,18.249 ccw(c25.461,17.359) 25.461,18.618 ccw(c25.461,19.877) C13.2@26.351,18.987 ; C13.2@26.72,18.618 20.142,18.618 17.576,21.184 C12.1@17.576,23.698 17.576,24.688 ; R64.1@26.784,38.531 cw(c28.396,38.562) 27.256,39.702 ; R64.1@27.241,38.54 cw(c29.887,38.591) 28.016,40.462 ; BT1.2@28.766,56.273 ccw(c27.205,57.834) 29.413,57.834 ccw(c31.621,57.834) 30.06,56.273 ccw(c32.663,58.876) 32.663,55.194 ; BT1.2@29.736,55.949 ccw(c31.56,57.773) 31.56,55.194 ; BT1.2@30.06,54.979 cw(c30.578,54.461) 30.578,55.194 ; R13.1@36.309,29.882 ccw(c35.419,30.772) 36.678,30.772 ccw(c37.937,30.772) R13.1@37.047,29.882 ; R108.1@36.309,34.024 cw(c35.419,33.134) 36.678,33.134 cw(c37.937,33.134) R108.1@37.047,34.024 ; R108.1@36.309,34.962 ccw(c35.419,35.852) 36.678,35.852 ccw(c37.937,35.852) R108.1@37.047,34.962 ; R13.1@36.678,29.413 R108.1@36.678,34.493 ; R108.1@37.047,34.124 cw(c37.937,33.234) 37.937,34.493 cw(c37.937,35.752) R108.1@37.047,34.862 ; C11.1@41.516,37.707 cw(c40.626,36.817) 41.885,36.817 cw(c43.144,36.817) C11.1@42.254,37.707 ; C11.1@41.885,38.797 ccw(c41.885,40.298) 42.946,39.237 ; v1@42.228,43.371 cw(c40.361,41.504) 43.002,41.504 ; v1@42.355,53.047 ccw(c40.794,54.608) 43.002,54.608 ccw(c45.21,54.608) v1@43.649,53.047 ; C11.1@42.406,38.276 cw(c43.424,38.276) 42.704,38.995 ; v1@42.552,43.695 cw(c41.465,42.608) 43.002,42.608 ; 43.002,42.117 cw(c44.776,42.117) v1@43.522,43.371 ; v1@43.002,43.637 43.002,39.293 C11.1@41.885,38.176 41.885,35.281 41.097,34.493 R108.1@36.678,34.493 ; v1(43.002,52.4) 43.002,55.194 ; U9.4@46.128,54.637 ccw(c44.784,53.293) 44.784,55.194 ccw(c44.784,57.095) U9.4@46.128,55.751 ; U9.4@47.078,54.894 cw(c47.554,53.866) 48.355,54.667 ; U9.4@47.27,54.479 cw(c47.847,53.233) 48.818,54.204 ; C20.1@48.449,52.869 ccw(c47.559,53.759) 48.818,53.759 ccw(c50.077,53.759) C20.1@49.187,52.869 ; C20.1@48.818,52.4 48.818,54.204 47.828,55.194 U9.4@46.812,55.194 43.002,55.194 ; C2.1@59.538,23.19 C3.1@62.153,23.19 ; C2.1@59.907,22.821 cw(c60.797,21.931) 60.797,23.19 cw(c60.797,24.449) C2.1@59.907,23.559 ; 60.845,21.722 ccw(c62.018,21.722) v1(61.544,20.65) 60.845,21.348 60.845,23.126 ccw(c62.639,23.126) v1@61.914,21.486 ; 60.845,22.424 ccw(c62.328,22.424) v1@61.729,21.068 ; C3.1@61.784,22.821 ccw(c60.894,21.931) 60.894,23.19 ccw(c60.894,24.449) C3.1@61.784,23.559 ; S1.2@63.651,15.076 66.878,15.076 ; S1.2@64.425,14.429 cw(c65.986,12.868) 65.986,15.076 cw(c65.986,17.284) S1.2@64.425,15.723 ; 64.82,20.142 66.243,20.142 66.979,20.878 ; U1.10@65.805,35.62 U1.9@66.605,36.42 ; C46.1@66.61,17.514 cw(c65.964,16.868) 66.878,16.868 ; 66.878,16.38 cw(c68.482,16.38) C46.1@67.348,17.514 ; C46.1@66.878,17.882 66.878,15.076 ; S1.2@69.377,14.429 ccw(c67.816,12.868) 67.816,15.076 ccw(c67.816,17.284) S1.2@69.377,15.723 ; S1.2@70.151,15.076 66.878,15.076 ; 73.583,73.753 cw(c71.005,71.175) 74.651,71.175 ; C68.2@73.769,68.499 cw(c71.641,66.37) C10.1@74.651,66.37 ; C68.2@73.769,69.829 ccw(c71.641,71.958) 74.651,71.958 ; 73.907,74.076 cw(c72.109,72.279) 74.651,72.279 ; C68.2@74.093,68.822 cw(c72.745,67.474) 74.651,67.474 ; C68.2@74.093,69.506 ccw(c72.745,70.854) 74.651,70.854 ; 74.14,74.5 74.651,73.989 C10.1@74.651,65.735 ; C10.1@74.199,66.096 ccw(c72.7,66.962) 74.372,67.41 ; 74.23,74.399 cw(c73.213,73.382) 74.651,73.382 ; C10.1@74.282,66.204 ccw(c73.392,67.094) 74.651,67.094 ccw(c75.91,67.094) C10.1@75.02,66.204 ; 74.546,66.764 ccw(c75.305,66.967) C10.1@74.912,66.287 ; 74.651,67.722 cw(c75.749,67.722) C68.2@74.973,68.499 ; 74.651,70.606 ccw(c75.749,70.606) C68.2@74.973,69.829 ; v1@80.582,40.323 cw(c79.021,38.762) 81.229,38.762 cw(c83.437,38.762) v1@81.876,40.323 ; C1.1@80.759,39.153 ccw(c79.625,40.287) v1@81.229,40.287 ; v1@80.921,40.109 cw(c80.829,39.851) 81.093,39.781 cw(c81.484,39.676) v1@81.406,40.073 ; 81.229,39.799 ccw(c82.143,39.799) C1.1@81.497,39.153 ; v1(81.229,40.97) 81.229,38.71 C1.1@81.255,38.684 ; P1.3@83.403,35.685 ccw(c82.059,37.029) 83.959,37.029 ccw(c85.86,37.029) P1.3@84.516,35.685 ; P1.5@83.403,37.111 cw(c82.059,35.767) 83.959,35.767 cw(c85.86,35.767) P1.5@84.516,37.111 ; P1.5@83.754,36.954 cw(c83.498,36.403) 84.085,36.56 ; 83.834,36.56 cw(c84.421,36.403) P1.5@84.165,36.954 ; P1.3@83.959,35.128 P1.5@83.959,37.668 ; 17.576,24.688 18.618,25.73 ; 18.618,25.73 18.618,28.905 ; 28.016,40.462 34.493,40.462 36.678,38.277 R108.1@36.678,34.493
  Bottom Layer w0.559: U1.13@63.405,36.42 63.405,39.275 63.703,39.573 66.605,39.573 ; C14.1@64.233,31.139 cw(c63.43,30.336) 64.566,30.336 cw(c65.702,30.336) C14.1@64.899,31.139 ; C14.1@64.566,32.143 ccw(c64.566,33.52) 65.54,32.546 ; C14.1@65.037,31.672 cw(c65.931,31.672) C14.1@65.299,32.305 ; U1.10@65.805,36.42 65.805,35.62 65.805,32.811 C14.1@64.566,31.572 64.566,30.328 66.497,28.397 66.497,24.714 66.979,24.232 66.979,20.878 C46.1@66.979,17.983 C46.1@66.878,17.882 ; U1.9@66.605,36.42 66.605,39.573 ; C46.1@66.646,18.416 ccw(c65.843,19.219) 66.979,19.219 ccw(c68.115,19.219) C46.1@67.312,18.416 ; 67.148,59.173 cw(c68.122,58.199) C69.1@68.122,59.576 ; C69.1@67.389,59.414 ccw(c66.757,60.047) C69.1@67.651,60.047 ; C69.1@68.122,60.147 66.605,58.63 U1.40@66.605,51.87 66.605,39.573 ; C1.1@81.255,38.684 82.88,38.684 83.896,37.668 P1.5@83.959,37.668 ; C1.1@81.461,38.351 cw(c82.264,37.548) 82.264,38.684 cw(c82.264,39.82) C1.1@81.461,39.017
  Bottom Layer w0.813: 14.653,31.092 ccw(c15.776,32.214) U3.11@15.776,30.627 ; U3.11@15.811,30.639 cw(c15.461,31.082) 15.062,30.683 ; U3.11@16.676,30.683 15.062,30.683 ; R13.1@36.678,29.413 38.557,29.413 39.954,28.016 39.954,19.761 42.748,16.967 v1(47.574,16.967) ; R13.1@36.921,29.17 cw(c37.508,28.583) 37.508,29.413 cw(c37.508,30.243) R13.1@36.921,29.656 ; 40.177,44.399 cw(c40.177,41.32) v1@42.354,43.497 ; v1@42.24,44.399 20.65,44.399 13.665,37.414 13.665,32.08 15.062,30.683 ; v1@47.053,16.446 ccw(c45.796,15.189) 45.796,16.967 ccw(c45.796,18.745) v1@47.053,17.488 ; v1(56.083,16.967) 57.861,16.967 ; v1@56.604,16.446 cw(c57.861,15.19) 57.861,16.967 ; v1@56.604,17.488 ccw(c57.861,18.744) 57.861,16.967 ; v1@60.807,20.65 cw(c59.029,20.65) 60.287,19.393 cw(c61.544,18.135) v1@61.544,19.913 ; v1@62.065,20.129 cw(c63.322,18.872) 63.322,20.65 cw(c63.322,22.428) v1@62.065,21.171 ; 64.82,20.142 64.312,20.65 v1(61.544,20.65) 57.861,16.967 ; v1@68.164,66.33 cw(c67.174,65.227) 68.656,65.227 ; v1(68.656,66.878) 68.656,65.227 ; v1@69.148,66.33 ccw(c70.138,65.227) 68.656,65.227 ; 73.345,63.312 ccw(c71.023,65.635) C10.1@74.307,65.635 ; C10.1@74.408,65.392 cw(c73.821,64.805) 74.651,64.805 cw(c75.481,64.805) C10.1@74.894,65.392 ; C10.1@74.651,65.735 74.651,64.618 72.847,62.814 71.069,62.814 68.656,65.227 ; 74.733,64.7 ccw(c73.798,65.635) C10.1@75.12,65.635
  other v1: 42.875,44.018
HT: D5.1 PULL.3 U1.31 | length 59.5
  Bottom Layer w0.457: D5.1@12.827,59.414 ccw(c13.816,60.403) 13.816,59.004 ; D5.1@12.852,59.639 13.487,59.004 PULL.3@16.205,59.004 ; D5.1@13.15,59.737 ccw(c14.92,61.507) 14.92,59.004 ; PULL.3@15.521,58.447 ccw(c14.177,57.103) 14.177,59.004 ccw(c14.177,60.905) PULL.3@15.521,59.561
  Bottom Layer w0.508: PULL.3@16.205,59.004 18.11,59.004 ; PULL.3@16.884,58.478 cw(c18.11,57.311) 18.11,59.004 ; PULL.3@16.884,59.529 ccw(c18.11,60.697) 18.11,59.004 ; U1.31@59.28,49.345 27.769,49.345 18.11,59.004
HTIN: D5.2 P1PANEL.2 | length 8.9
  Bottom Layer w0.457: P1PANEL.2@5.5,59.16 9.173,59.16 D5.2@9.652,59.639 ; P1PANEL.2@6.247,58.603 cw(c7.591,57.259) 7.591,59.16 cw(c7.591,61.061) P1PANEL.2@6.247,59.717 ; 7.961,59.16 ccw(c7.961,61.13) D5.2@9.354,59.737
LCD_DB#4: P4KB.3 U1.57 | length 28.2
  Bottom Layer w0.406: U1.57@74.73,43.745 76.547,43.745 89.422,56.62 P4KB.3@94.5,56.62 ; P4KB.3@93.735,56.045 ccw(c92.347,54.658) 92.347,56.62 ccw(c92.347,58.582) P4KB.3@93.735,57.195
LCD_DB#5: P4KB.4 U1.58 | length 27.5
  Bottom Layer w0.406: U1.58@74.73,42.945 76.609,42.945 87.744,54.08 P4KB.4@94.5,54.08 ; P4KB.4@93.735,53.505 ccw(c92.347,52.118) 92.347,54.08 ccw(c92.347,56.042) P4KB.4@93.735,54.655
LCD_DB#6: P4KB.5 U1.59 | length 26.7
  Bottom Layer w0.406: U1.59@74.73,42.145 76.671,42.145 86.066,51.54 P4KB.5@94.5,51.54 ; P4KB.5@93.735,50.965 ccw(c92.347,49.578) 92.347,51.54 ccw(c92.347,53.502) P4KB.5@93.735,52.115
LCD_DB#7: P4KB.6 U1.60 | length 26
  Bottom Layer w0.406: U1.60@74.73,41.345 76.733,41.345 84.388,49 P4KB.6@94.5,49 ; P4KB.6@93.735,48.425 ccw(c92.347,47.038) 92.347,49 ccw(c92.347,50.962) P4KB.6@93.735,49.575
LCD_E#: P4KB.2 U1.54 | length 28.2
  Bottom Layer w0.406: U1.54@74.73,46.145 77.514,46.145 90.529,59.16 P4KB.2@94.5,59.16 ; P4KB.2@93.735,58.585 ccw(c92.347,57.198) 92.347,59.16 ccw(c92.347,61.122) P4KB.2@93.735,59.735
LCD_RS#: P4KB.1 U1.53 | length 29
  Bottom Layer w0.406: U1.53@74.73,46.945 76.917,46.945 91.672,61.7 P4KB.1@94.5,61.7 ; P4KB.1@93.735,61.125 ccw(c92.347,59.738) 92.347,61.7 ccw(c92.347,63.662) P4KB.1@93.735,62.275
LED: R3.2 U1.46 | length 17.4
  Bottom Layer w0.406: U1.46@71.405,51.87 71.405,54.006 78.943,61.544 R3.2@81.457,61.544 ; R3.2@81.07,61.157 ccw(c80.137,60.224) 80.137,61.544 ccw(c80.137,62.864) R3.2@81.07,61.931
LLOP: D6.1 PULL.4 U1.30 | length 57.2
  Bottom Layer w0.457: D6.1@12.852,56.591 12.979,56.464 PULL.4@16.205,56.464 ; D6.1@13.15,56.093 cw(c14.046,55.197) 14.046,56.464 ; D6.1@13.15,56.689 ccw(c13.693,57.232) 13.693,56.464 ; PULL.4@15.521,55.907 ccw(c14.177,54.563) 14.177,56.464 ccw(c14.177,58.365) PULL.4@15.521,57.021
  Bottom Layer w0.508: PULL.4@16.205,56.464 19.126,56.464 27.045,48.545 U1.30@59.28,48.545 ; PULL.4@16.871,55.925 cw(c18.172,54.624) 18.172,56.464 cw(c18.172,58.304) PULL.4@16.871,57.003